# EAGLE board usb_dip_v1 (EAGLE 6.5.0)
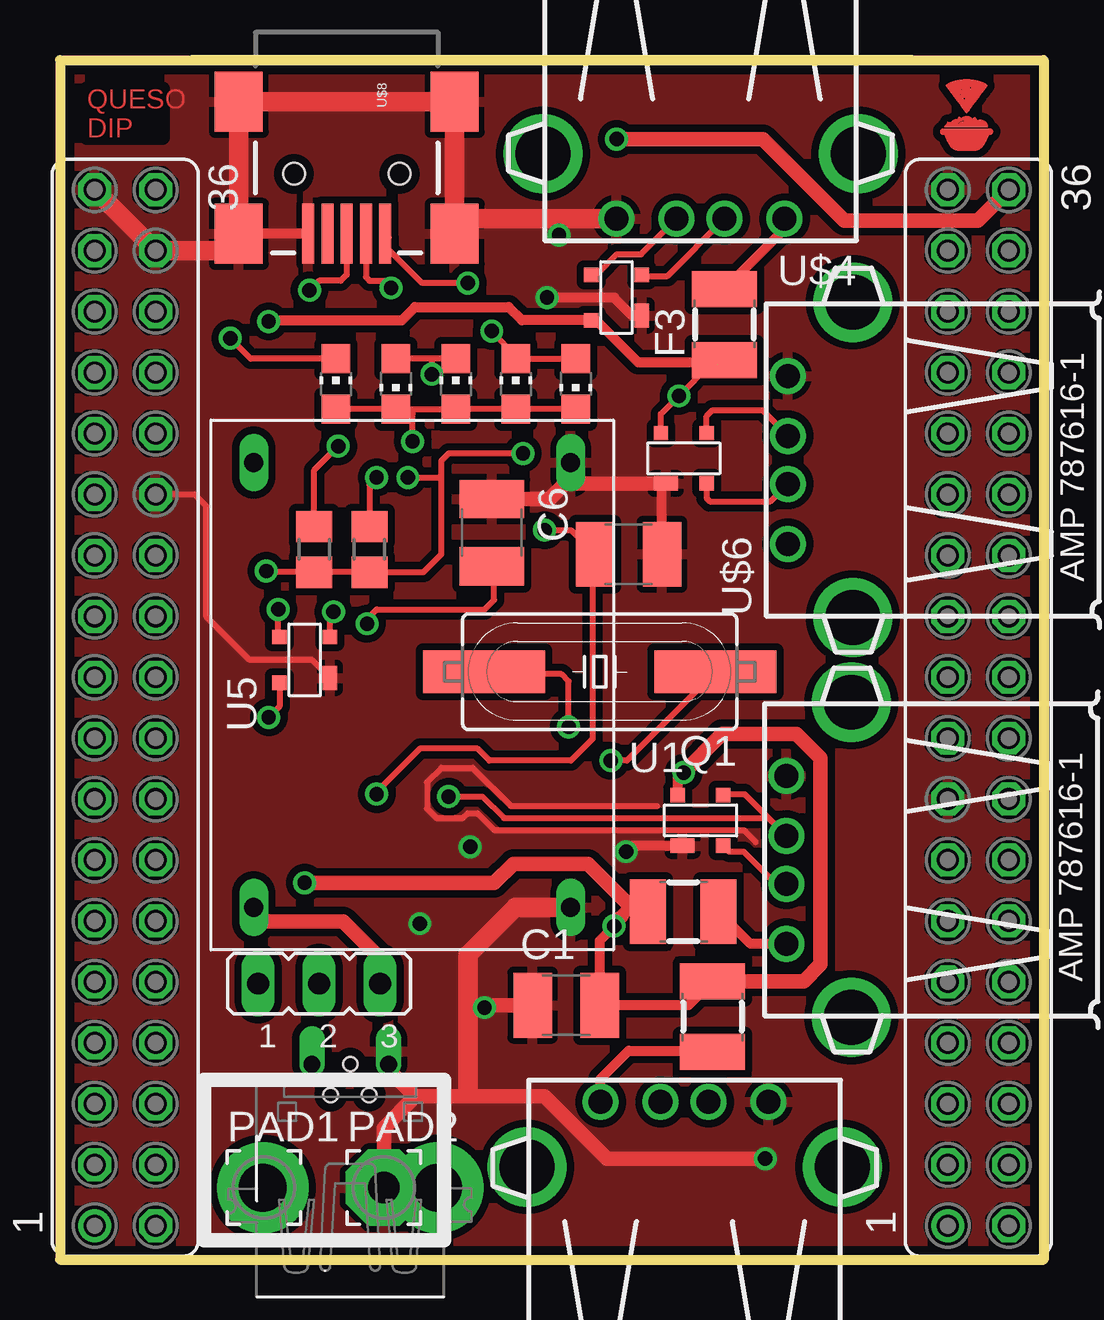
[diagram p0: board, top side]
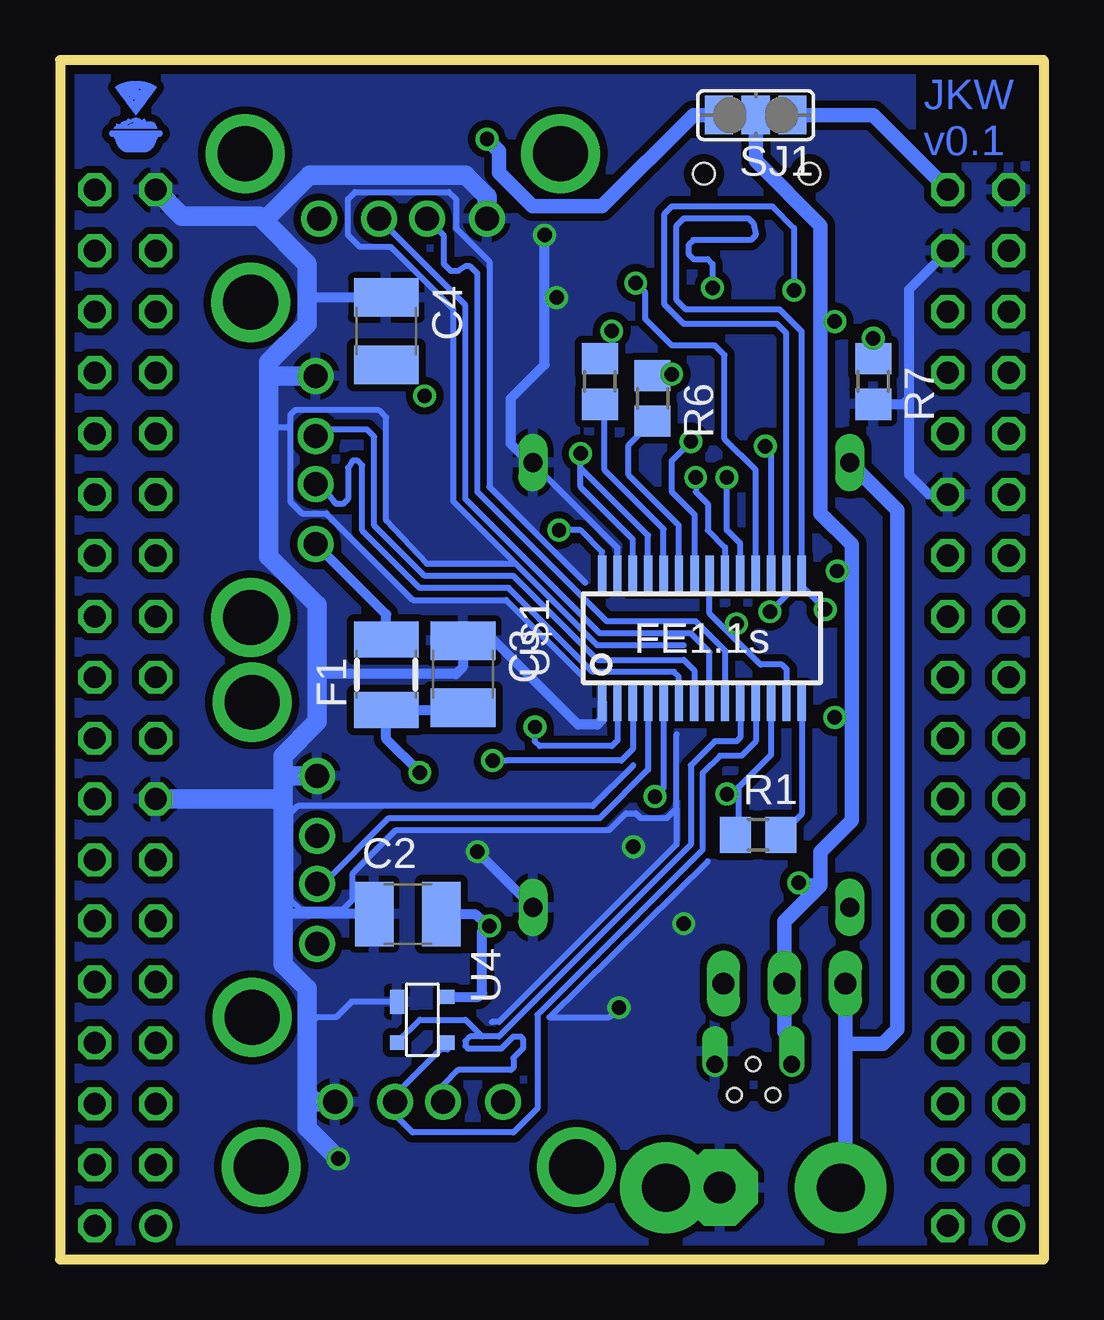
[diagram p1: board, bottom side, seen from below]

Size 41 x 50 mm. Coordinates in mm from the lower left corner, seen from the top.
Outline: 0,50 41,50 41,0 0,0 0,50
Copper layers (1*16): Top 0.0356mm / dielectric 1.5011mm / Bottom 0.0356mm
Design rules "LaenPCBOrder": minimum track width 6mil, minimum drill 13mil, track to track 6mil, track to pad 6mil, pad to pad 6mil, via to via 6mil, smd to smd 6mil, copper to edge 15mil, drill to drill 6mil, minimum pad ring 7mil, minimum via ring 7mil, stop-mask expansion 3mil, vias tented up to drill 0mil, thermal gap 10mil

## Footprints (pad centres in the part's own frame; a part is rotated, then mirrored left to right if it is on the bottom)
C1210 = smd 1.6 x 2.7: 1 -1.4,0; 2 1.4,0
1210 = smd 1.5 x 2.7: 1 -1.5,0; 2 1.45,0
JP2 = drill 0.914 long: 1 -2.54,0; 2 0,0; 3 2.54,0
CHIP-LED0805 = smd 1.2 x 1.2: A 0,-1.05; C 0,1.05
3,17/1,3 = drill 1.321 pad 3.175 octagon: 1 0,0
SM49 = smd 5.08 x 1.778: 1 -4.826,0; 2 4.826,0
R0805 = smd 1.3 x 1.5: 1 -0.95,0; 2 0.95,0
SJ_2 = smd 1.168 x 1.6: 1 -1.524,0; 2 0,0; 3 1.524,0
FE18-2 = drill 0.914: 1 -21.59,1.27 | drill 0.914 octagon: 2 -21.59,-1.27; 3 -19.05,1.27; 4 -19.05,-1.27; 5 -16.51,1.27; 6 -16.51,-1.27; 7 -13.97,1.27; 8 -13.97,-1.27; 9 -11.43,1.27; 10 -11.43,-1.27; 11 -8.89,1.27; 12 -8.89,-1.27; 13 -6.35,1.27; 14 -6.35,-1.27; 15 -3.81,1.27; 16 -3.81,-1.27; 17 -1.27,1.27; 18 -1.27,-1.27; 19 1.27,1.27; 20 1.27,-1.27; 21 3.81,1.27; 22 3.81,-1.27; 23 6.35,1.27; 24 6.35,-1.27; 25 8.89,1.27; 26 8.89,-1.27; 27 11.43,1.27; 28 11.43,-1.27; 29 13.97,1.27; 30 13.97,-1.27; 31 16.51,1.27; 32 16.51,-1.27; 33 19.05,1.27; 34 19.05,-1.27; 35 21.59,1.27; 36 21.59,-1.27
SOT-143B = smd 1 x 0.6: 1 -0.75,-1.05 | smd 0.6 x 0.6: 2 0.95,-1.05; 3 0.95,1.05; 4 -0.95,1.05
FE1.1S_SSOP-28 = smd 0.35 x 1.5: 1 -4.16,-2.7; 2 -3.52,-2.7; 3 -2.88,-2.7; 4 -2.24,-2.7; 5 -1.6,-2.7; 6 -0.96,-2.7; 7 -0.32,-2.7; 8 0.32,-2.7; 9 0.96,-2.7; 10 1.6,-2.7; 11 2.24,-2.7; 12 2.88,-2.7; 13 3.52,-2.7; 14 4.16,-2.7; 15 4.16,2.7; 16 3.52,2.7; 17 2.88,2.7; 18 2.24,2.7; 19 1.6,2.7; 20 0.96,2.7; 21 0.32,2.7; 22 -0.3,2.7; 23 -0.96,2.7; 24 -1.6,2.7; 25 -2.24,2.7; 26 -2.88,2.7; 27 -3.52,2.7; 28 -4.16,2.7
USB_TYPE_A_FEMALE_TH = drill 1: 1 -3.5,5.37; 2 -1,5.37; 3 1,5.37; 4 3.5,5.37 | drill 2.286: P$1 -6.57,2.66; P$2 6.57,2.66
USB-MINIB = smd 2.5 x 0.5: D+ 2.5,0; D- 2.5,0.8; GND 2.5,-1.6; ID 2.5,-0.8; VBUS 2.5,1.6 | smd 2.5 x 2: MTN1 -3,4.5; MTN2 2.5,4.5; MTN3 -3,-4.5; MTN4 2.5,-4.5 | hole 0.9: 0,2.2; 0,-2.2
MP1584EN = drill 0.8 long: GNDIN 1.778,14.986; GNDOUT 20.32,14.986; VIN 1.778,1.778; VOUT 20.32,1.778
USB-MINIB-THM-MOLEX-PWRONLY = drill 0.7 offset: GND 1.6,4.64; VBUS -1.6,4.64 | drill 2 pad 3.81: GND1 -3.65,-0.51; GND4 3.65,-0.51 | hole 0.6: 0,4.648; 0.787,3.353; -0.813,3.353

## Placement (x,y rotation side)
C1  10uF  [C1210]  21.1,10.6 0 top
C2  10uF  [C1210]  26.5,14.4 0 bottom
C3  10uF  [C1210]  24.2,24.4 270 bottom
C4  10uF  [C1210]  27.4,38.7 270 bottom
C5  10uF  [C1210]  23.7,29.4 180 top
C6  10uF  [C1210]  18,30.3 270 top
F1  [1210]  27.4,24.4 90 bottom
F2  [1210]  26,14.5 0 top
F3  [1210]  27.7,39 90 top
F4  [1210]  27.2,10.1 270 top
JP1  [JP2]  10.8,11.5 0 top
LED1  [CHIP-LED0805]  21.5,36.5 180 top
LED2  [CHIP-LED0805]  19,36.5 0 top
LED3  [CHIP-LED0805]  16.5,36.5 0 top
LED4  [CHIP-LED0805]  14,36.5 180 top
LED5  [CHIP-LED0805]  11.5,36.5 0 top
PAD1  WIREPAD3,17/1,3  [3,17/1,3]  8.5,3 0 top
PAD2  WIREPAD3,17/1,3  [3,17/1,3]  13.5,3 0 top
Q1  [SM49]  22.5,24.5 180 top
R1  2.7k  [R0805]  11.9,17.7 0 bottom
R3  10k  [R0805]  12.9,29.6 90 top
R4  10k  [R0805]  10.6,29.6 90 top
R5  330R  [R0805]  18.5,36.6 270 bottom
R6  330R  [R0805]  16.3,35.9 270 bottom
R7  330R  [R0805]  7.1,36.6 270 bottom
SJ1  [SJ_2]  12,47.7 180 bottom
SV2  [FE18-2]  2.72,23 90 top
SV3  [FE18-2]  38.28,23 90 top
U1  PRTR5V0U2X  [SOT-143B]  26.7,18.3 0 top
U2  PRTR5V0U2X  [SOT-143B]  26,33.4 0 top
U3  PRTR5V0U2X  [SOT-143B]  23.2,40.1 90 top
U4  PRTR5V0U2X  [SOT-143B]  25.9,10 270 bottom
U5  PRTR5V0U2X  [SOT-143B]  10.2,25 90 top
U$1  FE1.1S  [FE1.1S_SSOP-28]  14.24,25.9 0 bottom
U$2  LOGO  [LOGO]  36.54,46.02 0 top
U$3  USB_TYPE_A_FEMALE_TH  [USB_TYPE_A_FEMALE_TH]  26.04,1.2 0 top
U$4  USB_TYPE_A_FEMALE_TH  [USB_TYPE_A_FEMALE_TH]  26.71,48.75 180 top
U$5  LOGO  [LOGO]  39.09,46.1 0 bottom
U$6  USB_TYPE_A_FEMALE_TH  [USB_TYPE_A_FEMALE_TH]  35.71,33.33 90 top
U$7  USB_TYPE_A_FEMALE_TH  [USB_TYPE_A_FEMALE_TH]  35.65,16.66 90 top
U$8  USB-MINIB-5PIN  [USB-MINIB]  11.95,45.25 270 top
U$9  MP1584EN  [MP1584EN]  6.3,35 270 top
U$10  USB-PWR  [USB-MINIB-THM-MOLEX-PWRONLY]  12.1,3.5 0 top

## Library data of the parts
C1-C6 R1 R3-R7 = rcl
F1-F4 = m-pad-2.1
JP1 = jumper
LED1-LED5 = led
PAD1 PAD2 = wirepad
Q1 = adafruit; OC_FARNELL: unknown; OC_NEWARK: unknown
SJ1 = SparkFun-Retired
SV2 SV3 = con-lsta; OC_FARNELL: unknown; OC_NEWARK: unknown
U1-U5 = Volks73-NXPSemiconductors; APPLICATIONS: General Purpose; BIDIRECTIONAL_CHANNELS: 2; CAPACITANCE: 1pF @ 1MHz; CURRENT_PEAK_PULSE: -; DESCRIPTION: TVS DIODE 5.5VWM SOT143B; DOCUMENTATION_LINK: <a href="http://www.nxp.com/documents/data_sheet/PRTR5V0U2X.pdf">Datasheet</a>; DOCUMENTATION_URL: http://www.nxp.com/documents/data_sheet/PRTR5V0U2X.pdf; MANUFACTURER: NXP Semiconductors; MOUNTING_TYPE: Surface Mount; OPERATING_TEMPERATURE: -40C ~ 85C; PART_NUMBER: PRTR5V0U2X,215; POWER-PEAK_PULSE: -; POWER_LINE_PROTECTION: Yes; SUPPLIER_ITEM_LINK: <a href="http://www.digikey.com/product-detail/en/PRTR5V0U2X,215/568-4140-1-ND/1589981">Details</a>; SUPPLIER_ITEM_NUMBER: 568-4140-1-ND; SUPPLIER_ITEM_URL: http://www.digikey.com/product-detail/en/PRTR5V0U2X,215/568-4140-1-ND/1589981; SUPPLIER_LINK: <a href="http://www.digikey.com">Home Page</a>; SUPPLIER_NAME: Digi-Key; SUPPLIER_URL: http://www.digikey.com; TYPE: Steering (Rail to Rail); UNIDIRECTIONAL_CHANNELS: -; VOLTAGE_BREAKDOWN: 6V; VOLTAGE_CLAMPING: -; VOLTAGE_REVERSE: 5.5V
U$1 U$3 U$4 U$6 U$7 = imcom
U$2 U$5 = logo
U$8 = SparkFun-Connectors
U$9 = power_supply
U$10 = adafruit

## Nets
3V3: SV2.31
_1V8: SV2.29
_3V3: SV3.27
_5V: SV2.33
ADC: SV3.25
AP: SV3.14
AP2: SV3.13
BAT: SV2.30
CHIP_5V: SJ1.3 SV3.36
CHR_IN: SJ1.1 SV2.36
CSICK: SV3.10
CSIHSYNC: SV3.7
CSIPCK: SV3.9
CSVSYNC: SV3.8
D0: SV3.5
D1: SV3.6
D2: SV3.3
D3: SV3.4
D4: SV3.1
D5: SV3.2
DM1: U4.2 U$1.10 U$3.2
DM2: U3.2 U$1.8 U$4.2
DM3: U2.2 U$1.6 U$6.2
DM4: U1.2 U$1.4 U$7.2
DMU: U5.3 U$1.15 U$8.D-
DP1: U4.3 U$1.11 U$3.3
DP2: U3.3 U$1.9 U$4.3
DP3: U2.3 U$1.7 U$6.3
DP4: U1.3 U$1.5 U$7.3
DPU: U5.2 U$1.16 U$8.D+
FEL: SV3.29
GND: C1.1 C2.1 C3.1 C4.1 C5.1 C6.1 PAD2.1 R7.2 SV2.26 SV2.34 SV2.35 SV3.15 SV3.35 U1.1 U2.1 U3.1 U4.1 U5.1 U$1.1 U$1.27 U$3.4 U$4.4 U$6.4 U$7.4 U$8.GND U$8.MTN1 U$8.MTN2 U$8.MTN3 U$8.MTN4 U$9.GNDIN U$9.GNDOUT U$10.GND
HPCOM: SV3.32
HPL: SV3.34
HPR: SV3.30
INT0: SV3.20
INT1: SV3.18
LD2: SV2.19
LD3: SV2.20
LD4: SV2.17
LD5: SV2.18
LD6: SV2.15
LD7: SV2.16
LD8: SV2.13
LD9: SV2.14
LD10: SV2.11
LD11: SV2.12
LD12: SV2.9
LD13: SV2.10
LD14: SV2.7
LD15: SV2.8
LD16: SV2.5
LD17: SV2.6
LD18: SV2.3
LD19: SV2.4
LD20: SV2.1
LD21: SV2.2
MICIN: SV3.26
MICM: SV3.28
N$9: F2.2 U$7.1
N$10: F1.2 U$6.1
N$11: F3.2 U$4.1
N$12: F4.2 U$3.1
N$14: R5.2 U$1.24
N$15: R6.2 U$1.23
N$17: C6.2 U$1.13 U$1.21
N$18: C5.2 R1.1 U$1.12 U$1.28
N$22: R1.2 U$1.14
N$24: R4.2 U$1.17
N$25: R3.2 U$1.19
N$27: Q1.2 U$1.2
N$28: Q1.1 U$1.3
N$29: LED5.C R7.1
N$30: LED3.C LED4.A R6.1
N$31: LED1.A LED2.C R5.1
N$32: LED1.C LED2.A LED3.A LED4.C LED5.A U$1.22
P0: SV3.23
P1: SV3.24
P2: SV3.21
P3: SV3.22
P4: SV3.19
P6: SV3.17
PWRONN: SV2.28
RX: SV3.31
SCK: SV2.25
SCL2: SV3.12
SDA: SV2.27
SDA2: SV3.11
T5: SV2.32
TX: SV3.33
UNCONNECTED_GND: SV3.16
V_UP: U$1.18 U$8.VBUS
VCC: C1.2 C2.2 C3.2 C4.2 F1.1 F2.1 F3.1 F4.1 JP1.2 R3.1 R4.1 SJ1.2 U1.4 U2.4 U3.4 U4.4 U5.4 U$1.20 U$1.25 U$1.26 U$10.VBUS
VIN: JP1.1 PAD1.1 U$9.VIN
VOUT: JP1.3 U$9.VOUT
X1: SV2.23
X2: SV2.24
Y1: SV2.21
Y2: SV2.22

## Tracks (layer width: path | path; a pad name or v marks a point on that pad's centre or on a via)
CHIP_5V  (via drill 0.6)
  Top 0.61: v23.2,46.7 29.3,46.7 32.7,43.3 38.26,43.3 SV3.36
  Bottom 0.61: v23.2,46.7 22.7,46.2 22.7,45.3 21.3,43.9 18.4,43.9 14.6,47.7 SJ1.3
CHR_IN
  Bottom 0.61: 4.2,44.8 SV2.36 7.1,47.7 SJ1.1
DM1
  Bottom 0.254: 25.04,6.96 U$3.2 25.04,7.26 24.4,7.9 22.2,7.9 22.1,8 22.1,8.4 21.7,8.8 21.7,9.2 21.8,9.3 22.1,9.3 22.6,8.8 24,8.8 24.1,8.9 24.1,9.1 23.9,9.3 23.4,9.3 | U$1.10 12.64,21.76 12.8,21.6 13.7,21.6 14.7,20.6 14.7,17.3 22.7,9.3 23.4,9.3 | U4.2 26,10 24.1,10 23.4,9.3
DM2
  Top 0.254: 27.71,43.31 U$4.2 25.33,41 24.3,41 U3.2
  Bottom 0.254: U$1.8 13.92,25.32 14.7,26.1 18.5,26.1 24.1,31.7 24.1,39.77 U$4.2
DM3
  Top 0.254: 26.9,32.3 U2.2 26.95,31.75 27.1,31.6 29.61,31.6 U$6.2
  Bottom 0.254: U$1.6 15.2,24.3 15.4,24.5 18.8,24.5 22.3,28 26.01,28 28.4,30.39 28.4,33.1 28.6,33.3 28.8,33.3 29,33 29,31.7 29.2,31.5 29.5,31.5 30.13,32.33 U$6.2
DM4
  Top 0.254: U$7.2 29.84,15.66 28.5,17 27.9,17 U1.2
  Bottom 0.254: U$1.4 16.48,20.42 18.5,18.4 27.3,18.4 30.04,15.66 U$7.2
DMU  (via drill 0.6)
  Top 0.254: U$8.D- 12.75,40.95 12.9,40.8 13.5,40.8 v13.8,40.5 | U5.3 9.1,26 v9.1,27.1
  Bottom 0.254: v13.8,40.5 13.8,41.5 14,41.7 14.6,41.7 14.8,41.9 14.8,42.3 14.6,42.5 12.2,42.5 12,42.7 12.1,43.2 12.3,43.4 15,43.4 15.3,43.1 15.3,40 14.9,39.6 11,39.6 10.08,38.68 U$1.15 10.08,28.08 v9.1,27.1
DP1
  Bottom 0.254: U4.3 24.85,8.76 25.14,8.76 27.04,6.86 U$3.3 27.04,6.04 26.3,5.3 22.1,5.3 21.1,6.3 21.1,10.2 14.2,17.1 14.2,20.3 13.5,21 12.6,21 12,21.6 U$1.11
DP2
  Top 0.254: U3.3 22.1,41.1 22.4,41.1 23.2,41.9 24.23,41.9 U$4.3
  Bottom 0.254: U$1.9 13.28,25.38 14.5,26.6 18.2,26.6 23.6,32 23.6,41.1 23.9,41.4 24.1,41.4 24.4,41.2 24.7,41.2 25,41.5 25,42.67 U$4.3
DP3
  Top 0.254: U2.3 26.95,35.15 27.2,35.4 29.27,35.4 U$6.3
  Bottom 0.254: U$1.7 14.56,24.56 15,25 18.6,25 22.1,28.5 25.8,28.5 27.9,30.6 27.9,34.3 28.2,34.6 30.07,34.6 U$6.3
DP4  (via drill 0.6)
  Top 0.254: U1.3 27.7,19.4 28.54,19.4 U$7.3 | 29.34,18.6 U$7.3 | v16.2,19.3 17.6,19.3 18.5,18.4 29.54,18.4 U$7.3
  Bottom 0.254: U$1.5 15.84,19.66 v16.2,19.3
DPU  (via drill 0.6)
  Top 0.254: U$8.D+ 11.95,41.05 11.7,40.8 10.8,40.8 v10.4,40.4 | U5.2 11.25,26.85 v11.4,27
  Bottom 0.254: v10.4,40.4 10.4,43 11.3,43.9 15.5,43.9 15.8,43.6 15.8,39.8 15,39 11.1,39 10.72,38.62 U$1.16 10.7,28.58 10.7,27.7 v11.4,27
GND  (via drill 0.6)
  Top 0.254: 29,17.4 28.5,17.9 18.1,17.9 17.4,18.6 17,18.6 16.8,18.4 15.7,18.4 15.3,18.8 15.3,19.9 15.9,20.5 17.2,20.5 18.8,18.9 24.9,18.9 | U5.1 10.5,25 7.9,25 6.1,26.8 6.1,31.4 5.61,31.89 SV2.26
  Top 0.406: U$8.GND U$8.MTN4 | v20.8,42.7 20.8,43.38 | U3.1 23.85,39.35 23.1,40.1 v20.3,40.1 | U1.1 23.85,17.25 v23.6,17 | C5.1 25.1,32.2 U2.1
  Top 0.61: C6.1 20.4,31.7 21.3,32.6 | U2.1 21.55,32.35 21.3,32.6 | 21.3,32.6 21.3,33.21 U$9.GNDIN | PAD2.1 13.5,5.5 14.8,6.8 | 14.8,6.8 20.2,6.8 22.8,4.2 v29.4,4.2 | 14.8,6.8 13.7,7.9 U$10.GND | C1.1 17.1,10.6 17,10.5
  Top 0.813: U$4.4 20.8,43.38 17.08,43.38 16.85,43.15 | 16.85,43.15 U$8.MTN2 | 16.85,43.15 16.45,43.55 U$8.MTN1 U$8.MTN3 U$8.MTN4 6.75,42.05 SV2.34 SV2.35 | U$9.GNDOUT 18.98,14.68 17,12.7 17,10.5 17,7
  Bottom 0.254: U4.1 28.85,10.75 29.5,10.1 30.3,10.1 30.7,9.7 | 15,25.6 18.6,25.6 24.6,31.6 24.6,39.6 27.2,42.2 28.5,42.2 29,42.7 29,44.2 28.7,44.5 24.8,44.5 24.5,44.2 24.5,43 23.1,41.6 23.1,32.2 19.1,28.2 | 22.1,29 25.7,29 27.4,30.8 27.4,35.1 27.7,35.4 31.2,35.4 31.4,35.2 31.4,34.6 | 31.4,34.6 31.4,31.6 30.9,31.1 29.9,31.1 26.3,27.5 22.4,27.5 19.2,24.3 | 17.1,20.6 18.8,18.9 31.1,18.9 31.4,18.6 | 31.4,18.6 31.4,15 31,14.6 29.2,14.6 28.8,15 28.8,16.1 27,17.9 18.1,17.9 17.4,18.6 17,18.6 16.8,18.4 15.7,18.4 15.3,18.8 | 15.3,18.8 15.3,21.9 | 15.3,18.8 15.3,17.3 22.7,9.9 23,9.9 | 14,16.6 20.6,10.1 18.1,10.1 v17.7,10.5 | 32.3,34.7 31.5,34.7 31.4,34.6 | 31.4,18.6 31.5,18.6 31.7,18.8 | U$1.27 17.76,29.66 20.72,32.62 U$9.GNDIN
  Bottom 0.406: 30.18,23.3 30.28,23.2 | U$1.1 18.4,22.5 18.6,22.3 19.4,22.3 22.9,25.8 C3.1 24.2,24.7 24.5,24.4 30.28,24.4 | U$9.GNDIN 21.29,33.09 22.2,34 22.2,35.9 20.8,37.3 20.8,40.1 | 20.8,40.1 v20.8,42.7 | C2.1 31.7,14.4 | C4.1 30.7,40.1 | v20.3,40.1 20.8,40.1 | U$9.GNDOUT 21.3,14.09 21.3,14.7 v23.6,17 | SV2.26 4.79,31.89 5.6,32.7 5.6,35.9 | 5.6,35.9 5.6,40.44 SV2.34 | R7.2 5.85,35.65 5.6,35.9
  Bottom 0.813: 32.3,36.9 32.3,34.7 32.3,29.3 30.28,27.28 30.28,24.4 30.28,23.2 30.28,22.42 31.7,21 31.7,20.1 | 32.3,36.9 32.3,37.4 30.7,39 30.7,40.1 30.7,41.5 32.5,43.3 | 32.5,43.3 32.7,43.5 35.92,43.5 SV3.35 | 31.7,20.1 31.7,18.9 | 31.7,18.9 31.7,18.8 31.7,14.4 31.7,12.3 30.7,11.3 30.7,9.7 30.7,6.9 | 30.7,6.9 30.7,5.5 v29.4,4.2 | U$3.4 30.37,6.57 30.7,6.9 | U$7.4 31.64,20.16 31.7,20.1 | SV3.15 31.99,19.19 31.7,18.9 | U$6.4 32.23,36.83 32.3,36.9 | U$4.4 23.21,44.31 24.1,45.2 30.6,45.2 32.5,43.3
  other vias: 17.1,17.2 15,14
  pour Top (isolate 0.305, rank 2): -0.07,0.25 40.88,0.25 41.01,10.57 41.01,50.01 0,50.01 0,10.47
  pour Bottom (isolate 0.305): 0,50 41.05,50 41.05,0.25 0.02,0.25 0.02,49.92
N$9
  Top 0.406: U$7.1 28.79,13.16 F2.2
N$10
  Bottom 0.406: F1.2 27.4,26.89 U$6.1
N$11
  Top 0.406: U$4.1 30.21,42.96 F3.2
N$12
  Top 0.406: U$3.1 22.54,7.54 23.7,8.7 27.15,8.7 F4.2
N$14
  Bottom 0.254: 18.25,35.4 R5.2 18.3,35.45 18.3,32.9 15.84,30.44 U$1.24
N$15
  Bottom 0.254: U$1.23 15.2,30.6 17.3,32.7 17.3,33.95 R6.2
N$17  (via drill 0.6)
  Top 0.254: v12.8,26.5 12.8,26.7 13.2,27.1 17.7,27.1 18.1,27.5 18.1,28.8 C6.2 17.8,28.7
  Bottom 0.254: U$1.13 10.7,23.22 10.7,24.6 10.9,24.8 11.8,24.8 13.05,26.05 | 13.05,26.05 13.92,26.92 U$1.21 | v12.8,26.5 13.05,26.25 13.05,26.05
N$18  (via drill 0.6)
  Top 0.254: C5.2 22,29.4 | v20.2,30.4 21.3,30.4 C5.2 | C5.2 22.2,29.3 22.2,21.7 21.3,20.8 17.9,20.8 17.4,21.3 15,21.3 13.2,19.5 v13.2,19.4
  Bottom 0.254: U$1.12 11.36,21.04 12.7,19.7 12.7,19.4 | R1.1 12.7,17.85 12.7,19.4 | v13.2,19.4 12.7,19.4 | U$1.28 18.4,29.5 19.3,30.4 v20.2,30.4
N$22
  Bottom 0.254: U$1.14 10.08,18.57 R1.2
N$24  (via drill 0.6)
  Top 0.254: R4.2 10.6,32.9 v11.6,33.9
  Bottom 0.254: v11.6,33.9 11.36,33.66 U$1.17
N$25  (via drill 0.6)
  Top 0.254: v13.2,32.6 12.9,32.3 R3.2
  Bottom 0.254: U$1.19 12.64,29.84 13.2,30.4 v13.2,32.6
N$27  (via drill 0.6)
  Top 0.254: v21.2,22.2 21.2,24.1 20.9,24.4 17.77,24.4 Q1.2
  Bottom 0.254: U$1.2 17.76,21.64 18,21.4 21,21.4 21.2,21.6 v21.2,22.2
N$28  (via drill 0.6)
  Top 0.254: Q1.1 23.63,20.8 v22.96,20.8
  Bottom 0.254: U$1.3 17.12,21.28 17.6,20.8 22.4,20.8 v22.96,20.8
N$29  (via drill 0.6)
  Top 0.254: LED5.C 7.95,37.55 v7.1,38.4
  Bottom 0.254: v7.1,38.4 R7.1
N$30  (via drill 0.6)
  Top 0.254: LED3.C 15.5,37.55 | 15.5,37.55 LED4.A | v15.5,36.9 15.5,37.55
  Bottom 0.254: R6.1 15.55,36.85 v15.5,36.9
N$31  (via drill 0.6)
  Top 0.254: LED1.A LED2.C 19,37.6 v18,38.7
  Bottom 0.254: v18,38.7 18,38.05 R5.1
N$32  (via drill 0.6)
  Top 0.254: LED1.C LED2.A LED3.A 14.5,35.45 | 13.9,35.45 LED4.C | LED4.C LED5.A | LED4.C 14.5,35.45 | v14.7,34.1 14.7,35.25 14.5,35.45
  Bottom 0.254: U$1.22 14.54,31.04 15.5,32 15.5,33.3 v14.7,34.1
V_UP  (via drill 0.6)
  Top 0.254: v17,40.7 15.1,40.7 13.7,42.1 13.7,42.6 U$8.VBUS
  Bottom 0.254: U$1.18 12,32.9 13.3,34.2 13.3,37.7 13.7,38.1 15.5,38.1 16.6,39.2 16.6,40.3 v17,40.7
VCC  (via drill 0.6)  (1 unrouted)
  Top 0.254: v8.6,28.7 8.65,28.65 R4.1 R3.1 15.15,28.65 15.9,29.4 15.9,32.5 | F3.1 27.5,37.3 C4.2 27.1,37.3 v25.8,36 25.05,35.25 U2.4 | U5.4 9.15,23.05 v8.7,22.6 | 15.9,32.5 15.9,33.3 16.2,33.6 v19.3,33.6 | v14.5,32.6 15.8,32.6 15.9,32.5
  Top 0.406: 23.5,14.5 24,14.5 F2.1 | 23.2,14.2 23.5,14.5 | v8.7,39.1 8.75,39.15 14.25,39.15 14.8,39.7 18.7,39.7 19.25,39.15 U3.4 22.35,39.15 24.1,37.4 27.3,37.4 C4.2 | F3.1 26.5,37.5 | U1.4 25.75,20.05 v26,20.3 | F4.1 26.2,10.6 C1.2 22.5,13.3 v23.1,13.9 23.5,14.3 23.5,14.5
  Top 0.61: F4.1 31,11.6 31.7,12.3 31.7,20.9 30.7,21.9 27.6,21.9 v26,20.3 | 24,14.5 22,16.5 18.9,16.5 18.1,15.7 v10.2,15.7
  Bottom 0.254: v8.6,28.7 8,28.7 | v8.7,22.6 8,22.6 | U$1.26 17.12,30.02 19.3,32.2 v19.3,33.6 19.3,33 16.48,30.18 U$1.25 | v14.5,32.6 14.5,32 14,31.5 14,30.4 13.28,29.68 U$1.20
  Bottom 0.406: v10.2,15.7 9.4,15.7 9.3,15.6 | C2.2 23.7,14.4 v23.1,13.9 23.4,13.7 23.4,11.1 23.55,10.95 U4.4 | v8.7,39.1 9.2,39.1 9.3,39.2 | v26,20.3 27.4,21.7 F1.1 24.3,22.9 C3.2
  Bottom 0.61: SJ1.2 12,45.8 9.3,43.1 9.3,39.2 9.3,31.1 8,29.8 8,28.7 8,22.6 8,18.3 9.3,17 9.3,15.6 10.8,14.1 JP1.2 10.8,9.5 10.5,9.2 U$10.VBUS
VIN
  Bottom 0.61: U$9.VIN 6.1,31.24 6.1,9.6 6.7,9 8.26,9 | PAD1.1 8.26,3.24 8.26,9 | 8.26,9 JP1.1
VOUT
  Top 0.61: JP1.3 13.34,12.56 11.8,14.1 8.1,14.1 U$9.VOUT

## Text on the board
Top: QUESO / DIP
Bottom: JKW / v0.1
tNames: Ordered 2016/03/01 at OSH
tStop: SALSA / DIP
bStop: JKW / v3.9